# EAGLE board power_supply_5v_3.3v_v10_othermill (EAGLE 8.0.2)
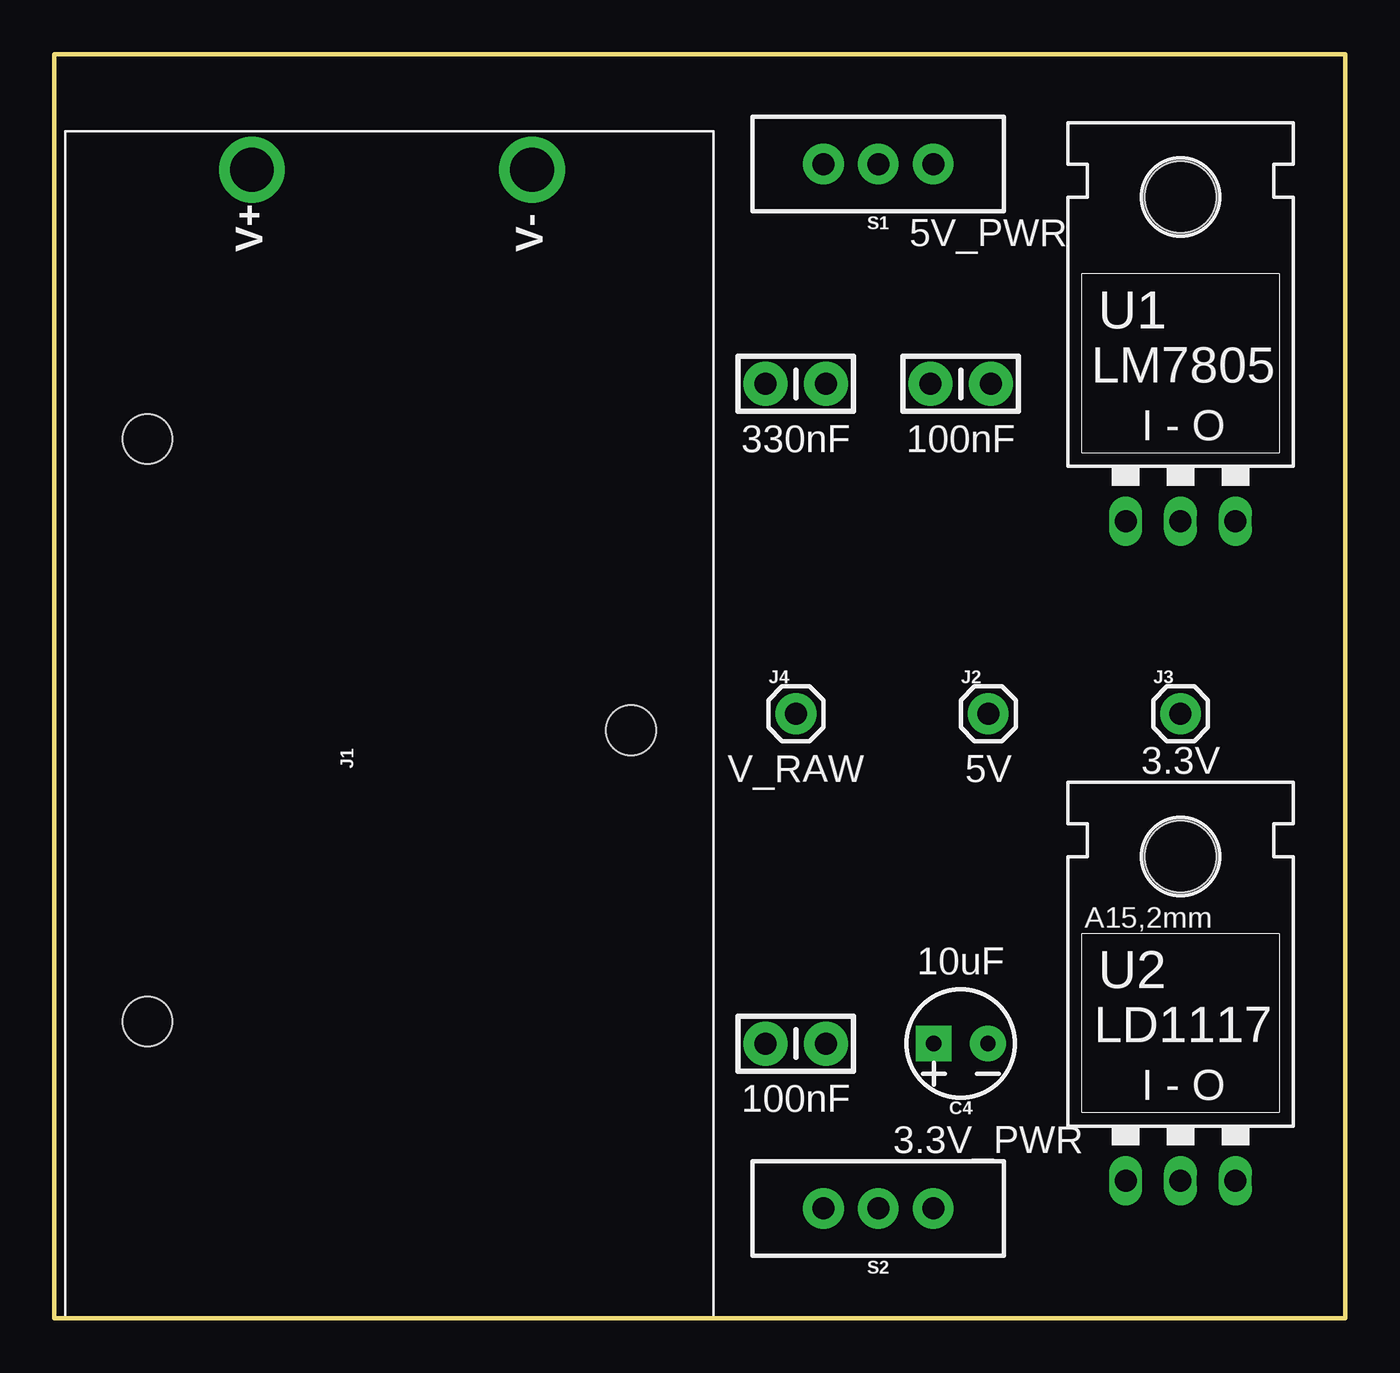
[diagram p0: board, top side]
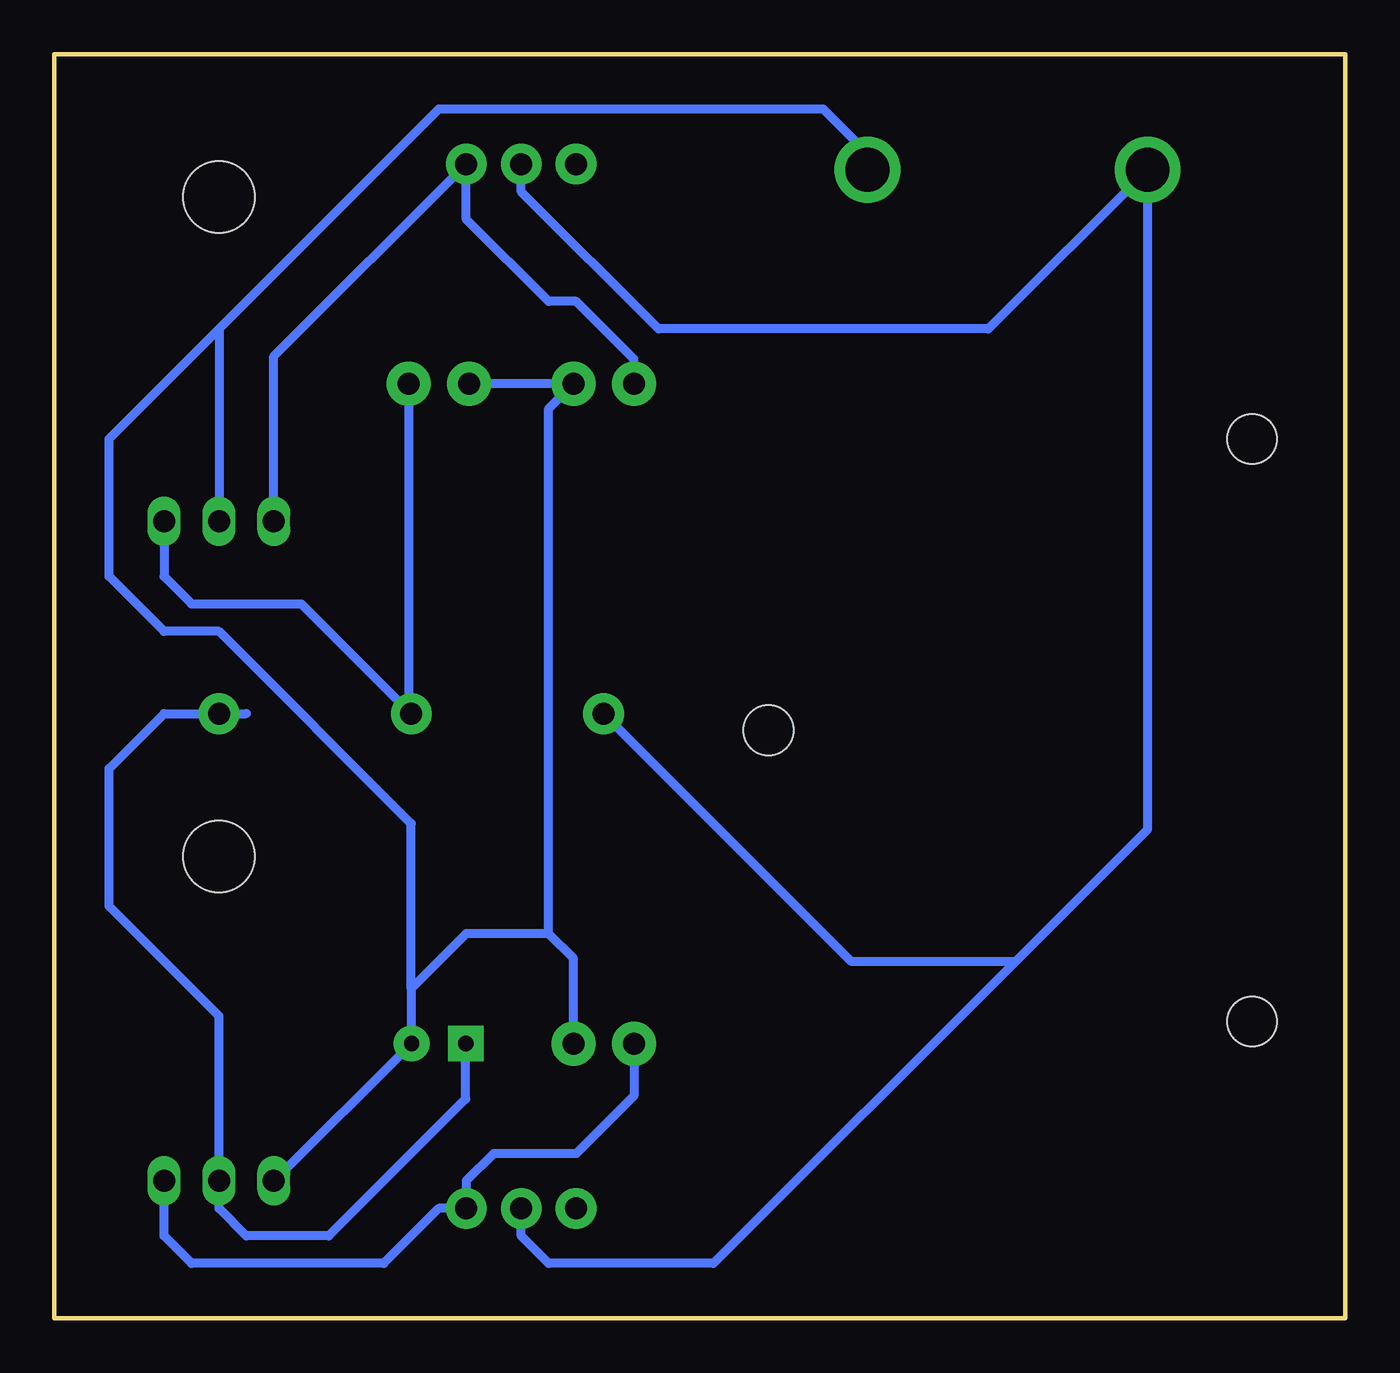
[diagram p1: board, bottom side, seen from below]

Size 59.69 x 58.42 mm. Coordinates in mm from the lower left corner, seen from the top.
Outline: 0,0 0,58.42 59.69,58.42 59.69,0 0,0
Copper layers (1*16): Top 0.035mm / dielectric 1.5mm / Bottom 0.035mm
Design rules "OthermillDRC_1_32_v2": minimum track width 8mil, minimum drill 0.8mm, track to track 0.794003125mm, track to pad 0.794003125mm, pad to pad 0.794003125mm, via to via 0.794003125mm, smd to smd 0mil, copper to edge 0mil, drill to drill 1mil, minimum pad ring 10mil, minimum via ring 10mil, stop-mask expansion 1mil, vias tented up to drill 30mil, thermal gap 10mil

## Footprints (pad centres in the part's own frame; a part is rotated, then mirrored left to right if it is on the bottom)
CAP-PTH-SMALL-KIT = drill 1.016 pad 2.032: 1 -1.397,0; 2 1.397,0
CPOL-RADIAL-2.5MM-5MM = drill 0.7 pad 1.651 square: 1 1.25,0 | drill 0.7 pad 1.651: 2 -1.25,0
BC9VPC = drill 2.032: V+ 53.086,21.336; V- 53.086,8.382 | hole 2.286: 27.178,3.81; 13.716,26.162; 40.64,26.162
1X01 = drill 1.016 pad 1.88: 1 0,0
SWITCH_SPDT_PTH_11.6X4.0MM = drill 1.016 pad 1.88: 1 0,2.54; 2 0,0; 3 0,-2.54
TO-220-ALT = drill 1.016 long: GND 0,-3.81; IN -2.54,-3.81; OUT 2.54,-3.81 | hole 3.302: 0,11.176
78XXL = drill 1.016 long: GND 0,-3.81; IN -2.54,-3.81; OUT 2.54,-3.81 | hole 3.302: 0,11.176

## Placement (x,y rotation side)
C1  330nF  [CAP-PTH-SMALL-KIT]  34.29,43.18 0 top
C2  100nF  [CAP-PTH-SMALL-KIT]  41.91,43.18 180 top
C3  100nF  [CAP-PTH-SMALL-KIT]  34.29,12.7 180 top
C4  10uF  [CPOL-RADIAL-2.5MM-5MM]  41.91,12.7 180 top
FRAME1  FRAME-LETTER  [CREATIVE_COMMONS]  3.81,-7.62 0 top  (outside the outline)
J1  9V  [BC9VPC]  30.48,0 90 top
J2  5V  [1X01]  43.18,27.94 0 top
J3  3.3V  [1X01]  52.07,27.94 0 top
J4  V_RAW  [1X01]  34.29,27.94 0 top
S1  5V_SWITCH  [SWITCH_SPDT_PTH_11.6X4.0MM]  38.1,53.34 90 top
S2  3.3V_SWITCH  [SWITCH_SPDT_PTH_11.6X4.0MM]  38.1,5.08 90 top
U1  LM7805  [TO-220-ALT]  52.07,40.64 0 top
U2  LD1117V33  [78XXL]  52.07,10.16 0 top

## Library data of the parts
C1-C3 = SparkFun-Capacitors; PROD_ID: CAP-08370
C4 = SparkFun-Capacitors; PROD_ID: CAP-08440
FRAME1 = SparkFun-Aesthetics
J1 = SparkFun-Connectors; PROD_ID: BATT-10855
J2-J4 = SparkFun-Connectors
S1 S2 = SparkFun-Switches; PROD_ID: SWCH-08261; SF_SKU: COM-00102
U1 = SparkFun-IC-Power; PROD_ID: VREG-08450; SF_ID: COM-00107
U2 = SparkFun-IC-Power

## Nets
3.3V: C4.1 J3.1 U2.GND
5V: C2.1 J2.1 U1.OUT
GND: C1.2 C2.2 C3.1 C4.2 J1.V- U1.GND U2.IN
VIN: J1.V+ J4.1 S1.2 S2.2
VIN_1: C1.1 S1.3 U1.IN
VIN_2: C3.2 S2.3 U2.OUT

## Tracks (layer width: path | path; a pad name or v marks a point on that pad's centre or on a via)
3.3V
  Bottom 0.406: C4.1 40.66,10.14 46.99,3.81 50.8,3.81 52.07,5.08 U2.GND 52.07,13.97 57.15,19.05 57.15,25.4 54.61,27.94 J3.1 50.8,27.94
5V
  Bottom 0.406: C2.1 43.31,28.07 J2.1 48.26,33.02 53.34,33.02 54.61,34.29 U1.OUT
GND
  Bottom 0.406: C2.2 C1.2 36.83,42.04 36.83,17.78 | J1.V- 22.1,53.85 24.13,55.88 41.91,55.88 52.07,45.72 | 52.07,45.72 U1.GND | 52.07,45.72 57.15,40.64 57.15,34.29 54.61,31.75 52.07,31.75 43.18,22.86 43.18,15.24 | C3.1 35.69,16.64 36.83,17.78 | 36.83,17.78 40.64,17.78 43.18,15.24 | 43.18,15.24 43.18,12.72 C4.2 49.51,6.35 U2.IN
VIN
  Bottom 0.406: 15.24,16.51 9.14,22.61 J1.V+ 16.51,45.72 31.75,45.72 38.1,52.07 S1.2 | 15.24,16.51 29.21,2.54 36.83,2.54 38.1,3.81 S2.2 | J4.1 22.86,16.51 15.24,16.51
VIN_1
  Bottom 0.406: U1.IN 49.53,44.45 S1.3 40.64,50.8 36.83,46.99 35.56,46.99 32.89,44.32 C1.1
VIN_2
  Bottom 0.406: C3.2 32.89,10.29 35.56,7.62 39.37,7.62 40.64,6.35 S2.3 41.91,5.08 44.45,2.54 53.34,2.54 54.61,3.81 U2.OUT

## Text on the board
tPlace: 5V_PWR | LM7805 | I - O | 330nF | 100nF | V_RAW | 5V | 3.3V | 10uF | LD1117 | I - O | 100nF | 3.3V_PWR
tDocu: Phi Luu